# Altium PCB Arduino_Board.PcbDoc
Units mil, origin at the board's own origin, x right, y up, seen from the top; angles counter-clockwise.
Board outline 2677.17 x 1988.19 mil, 2 copper layers (Top Layer, Bottom Layer); 51 components, 49 nets, 203 pads, 74 vias.
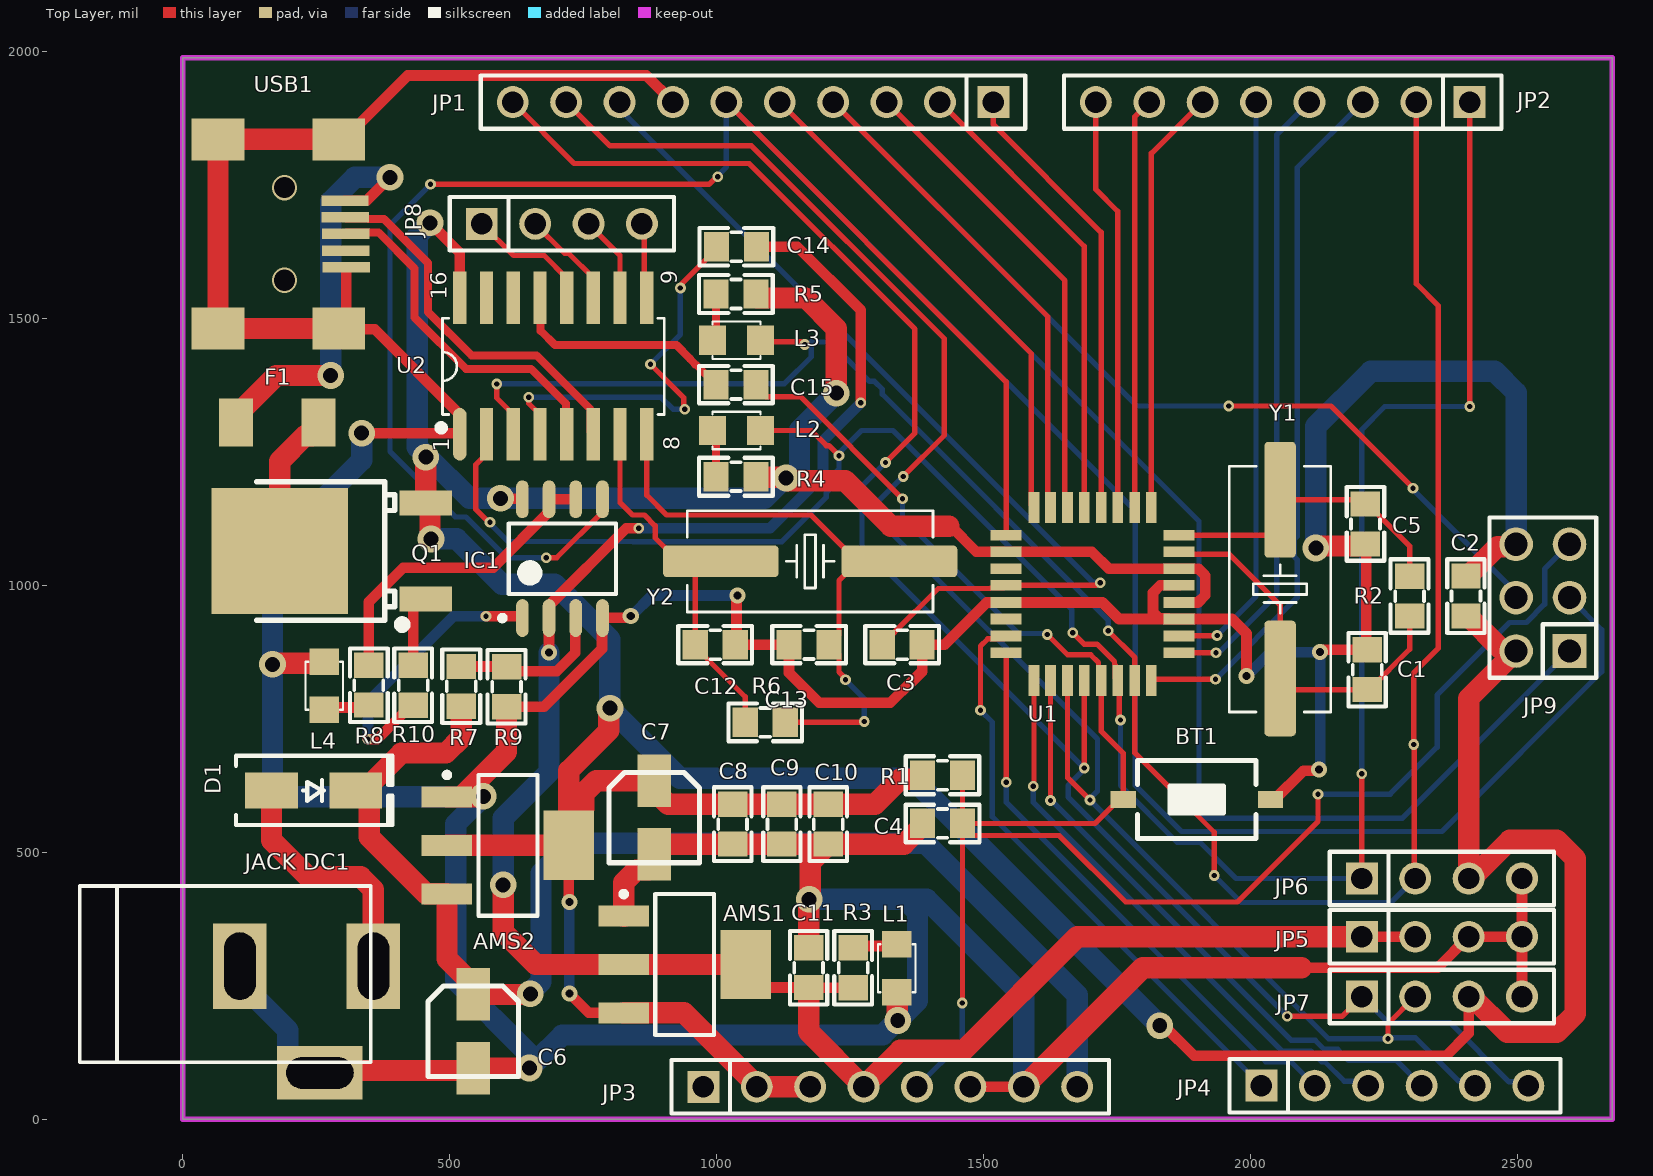
[diagram p0: Top Layer view]
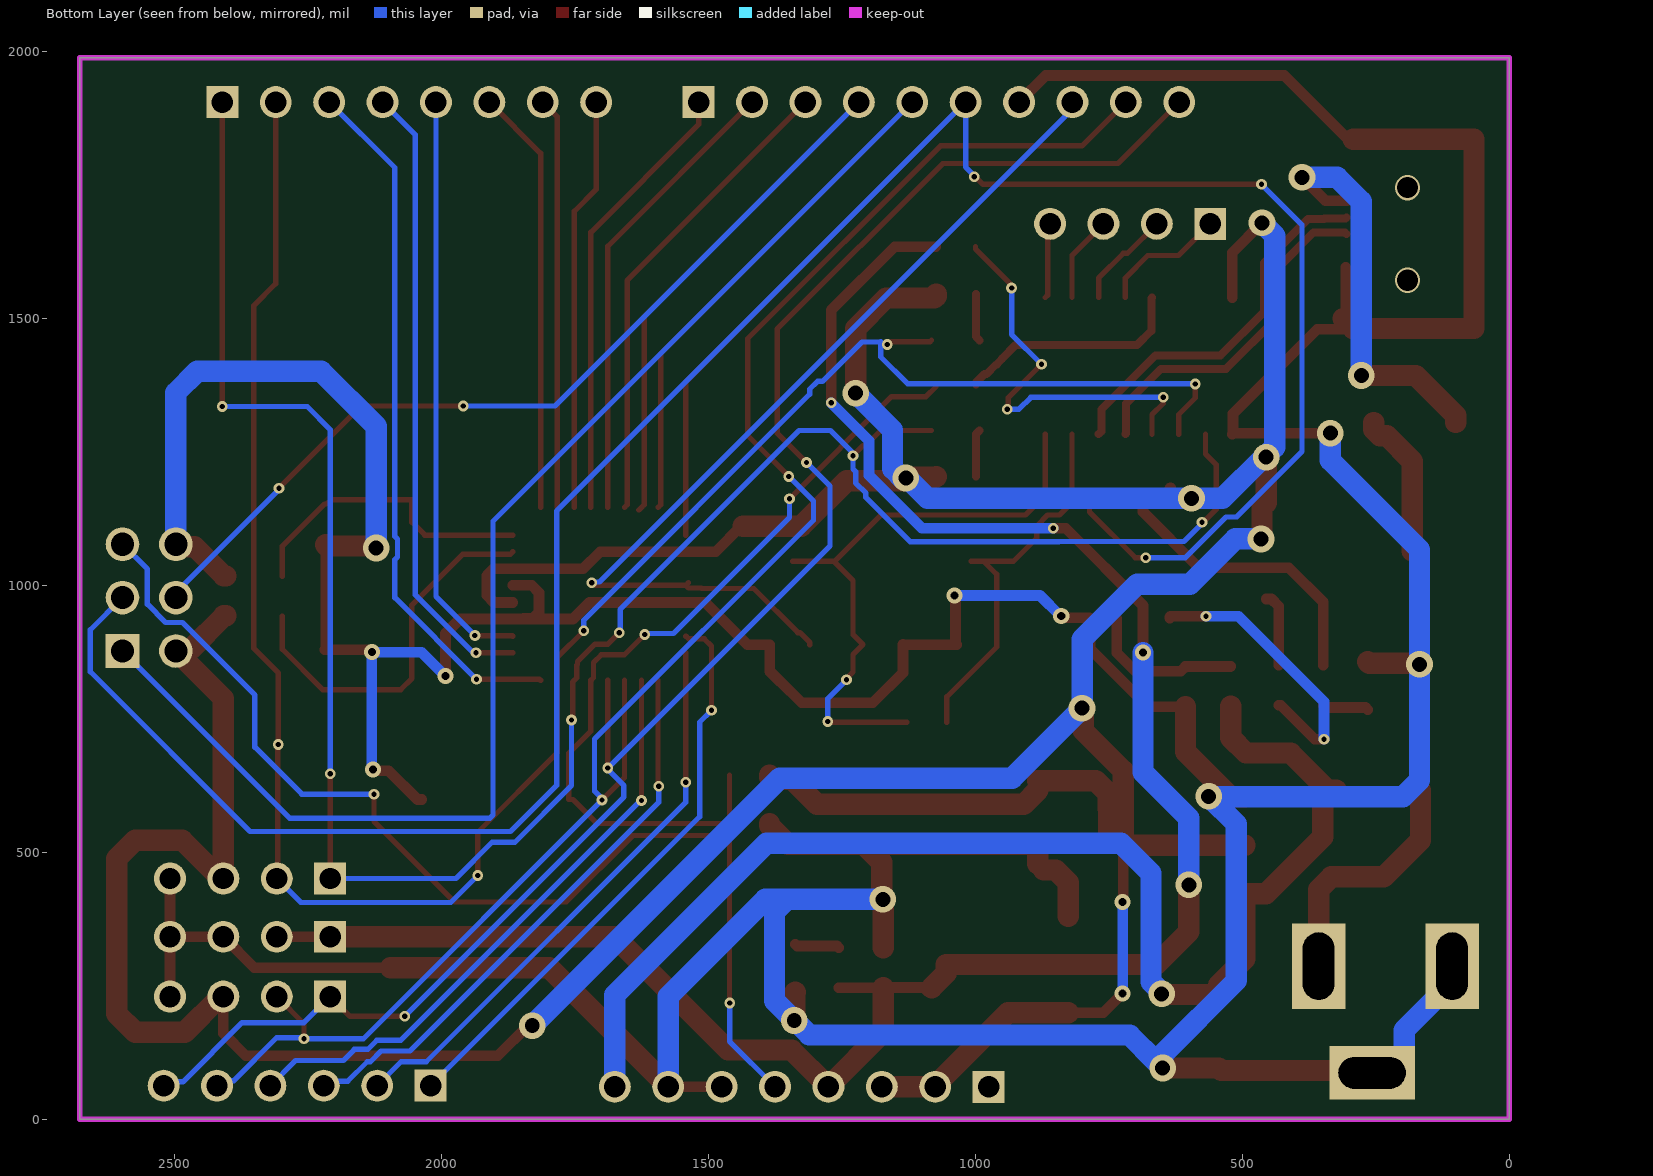
[diagram p1: Bottom Layer view, seen from below]
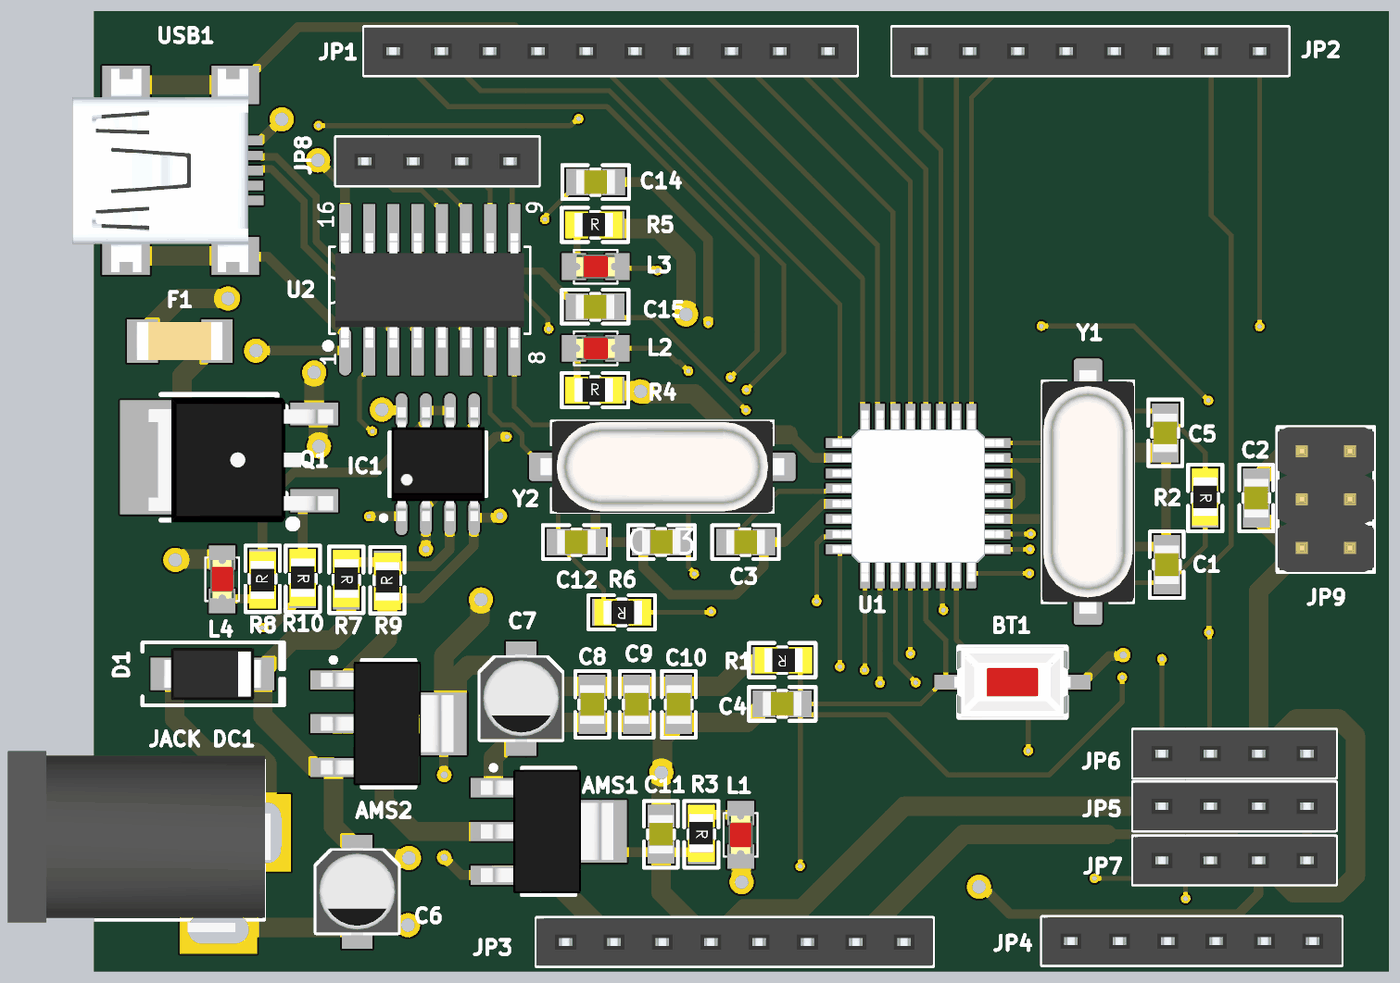
[diagram p2: 3D render of the assembled board from above, using the file's embedded part models]

## Layer stack, top to bottom
Top Solder: solder mask 0.4, Solder Resist, Dk 3.5
Top Layer: signal copper 1.4
Dielectric 1: dielectric 12.6, FR-4, Dk 4.8
Bottom Layer: signal copper 1.4
Bottom Solder: solder mask 0.4, Solder Resist, Dk 3.5

## Board outline
0,0 2677.17,0 2677.17,1988.19 0,1988.19

## Design rules (kind name [scope] priority, off if disabled: settings)
Clearance [All] p1: gap=10 ignorepadtopadclearanceinfootprint=FALSE except(0: Arc-Hole Track-Hole SMDPad-Hole THPad-Hole Via-Hole Fill-Hole Poly-Hole Region-Hole Text-Hole)
DiffPairsRouting [All] p1: maxlimit=10 minlimit=10 mostfreqgap=10 toplayer_minwidth=15 toplayer_maxwidth=15 toplayer_prefwidth=15 bottomlayer_minwidth=15 bottomlayer_maxwidth=15 bottomlayer_prefwidth=15 maxuncoupledlength=500
PolygonConnect [All] p1: connectstyle=Relief reliefconductorwidth=10 reliefentries=4 polygonreliefangle="90 Angle" airgapwidth=10
RoutingVias [All] p1: holewidth=15 width=30 viastyle="Through Hole" minholewidth=10 minwidth=20 maxholewidth=28 maxwidth=50
SolderMaskExpansion [All] p1: expansion=4 istentingtop=FALSE
Width [All] p1: maxlimit=40 minlimit=10 preferedwidth=20
29 further rules are at their usual default settings.

## Classes and differential pairs
differential pair USB: +USB_P -USB_N

## Components (designator, comment, footprint, x,y, rotation, side; value= is the part's Value field where it differs from the comment)
AMS1 "AMS1117-3.3V" SOT223 940,290 r270 top value="AMS1117-3.3V SOT223"
AMS2 "AMS1117-5V" SOT223 609,513 r270 top value="AMS1117-3.3V SOT223"
BT1 "Nut Nhan 2 Chan SMD 3x6x2.5" "Nut Nhan 2 Chan SMD 3x6x2.5" 1899,599 r180 top
C1 "22pF" "tu 0805" 2218,842 r90 top
C2 "104" "tu 0805" 2403,980 r90 top
C3 "104" "tu 0805" 1347,889 r0 top
C4 "104" "tu 0805" 1423,554 r180 top
C5 "22pF" "tu 0805" 2215,1115 r270 top
C6 "10uF" "tu nhom 4 (b)" 544,165 r270 top
C7 "10uF" "tu nhom 4 (b)" 883,565 r270 top
C8 "104" "tu 0805" 1030,553 r270 top
C9 "104" "tu 0805" 1122,553 r270 top
C10 "104" "tu 0805" 1209,553 r270 top
C11 "104" "tu 0805" 1172,284 r90 top
C12 "22pF" "tu 0805" 997,889 r0 top
C13 "22pF" "tu 0805" 1173,889 r180 top
C14 "104" "tu 0805" 1037,1634 r180 top
C15 "104" "tu 0805" 1035.94,1376 r0 top
D1 "M7" "DIODE SMA" 245,616 r0 top
F1 "0.5A 125V" "Cau Chi SMD1808" 177,1305 r0 top
IC1 "LM358 SOP8" "SOP 8" 711,1050 r90 top
"JACK DC1" "JACK DC 5.5" "JACK DC 5.5" 232,187 r0 top value="Jac DC"
JP1 "JP 1x10 2.54" "JP 1x10 CT" 1518,1905 r180 top
JP2 "JP 1x8 2.54" "JP 1x8 CT" 2410,1905 r180 top
JP3 "JP 1x8 2.54" "JP 1x8 CT" 975,61 r0 top
JP4 "JP 1x6 2.54" "JP 1x6 CT" 2020,63 r0 top
JP5 "JP 1x4 2.54" "JP 1x4 CT" 2208,342 r0 top
JP6 "JP 1x4 2.54" "JP 1x4 CT" 2208,451 r0 top
JP7 "JP 1x4 2.54" "JP 1x4 CT" 2208,230 r0 top
JP8 "JP 1x4 2.54" "JP 1x4 CT" 560,1677 r0 top
JP9 "JP 2x3 2.54" "JP 2x3 DT" 2547,977 r90 top
L1 "LED 0805" LED-0805-Red 1337,328 r270 top
L2 "LED 0805" LED-0805-Red 992,1290 r0 top
L3 "LED 0805" LED-0805-Red 992,1459 r0 top
L4 "LED 0805" LED-0805-Red 265,767 r90 top
Q1 "TO-252" TO-252-3_L6.6-W6.1-P4.57-LS9.9-BR-CW 279,1059 r0 top
R1 "10k" "tro smd 0805" 1422.9,642 r180 top
R2 "1M" "tro smd 0805" 2300,980 r270 top
R3 "220R" "tro smd 0805" 1258,284 r270 top
R4 "1k" "tro smd 0805" 1035.83,1206 r0 top
R5 "1k" "tro smd 0805" 1035.83,1548 r0 top
R6 "1M" "tro smd 0805" 1091,741 r180 top
R7 "10k" "tro smd 0805" 524,811 r270 top
R8 "1k" "tro smd 0805" 346,813 r90 top
R9 "10k" "tro smd 0805" 604,810 r90 top
R10 "10k" "tro smd 0805" 434,813 r270 top
U1 "ATMEGA168-20AU" ATMEGA168 1704,984 r180 top
U2 "CH340C" SOIC16_50_284_25X90_SMT 693,1411 r90 top
USB1 "USB Mini 5p SMD" "USB Mini 5p SMD" 169,1655 r90 top
Y1 "16Mhz" "Thach Anh 2 chan SMD" 2055,993 r270 top value=4Mhz
Y2 "12Mhz" "Thach Anh 2 chan SMD" 1175,1045 r180 top value=4Mhz

## Footprints (in the part's own frame and the unit in brackets; to place one, negate y for a bottom-side part, rotate by r counter-clockwise, add the part's x,y. Pads: shape width x height; smd on the part's side, far side on the other; paste and mask are expansions set on the pad)
ATMEGA168 [mil]
  rect 58x20 smd: 1(-162,110) 2(-162,79) 3(-162,47) 4(-162,16) 5(-162,-16) 6(-162,-47) 7(-162,-79) 8(-162,-110) 17(162,-110) 18(162,-79) 19(162,-47) 20(162,-16) 21(162,16) 22(162,47) 23(162,79) 24(162,110)
  rect 20x58 smd: 9(-110,-162) 10(-79,-162) 11(-47,-162) 12(-16,-162) 13(16,-162) 14(47,-162) 15(79,-162) 16(110,-162) 25(110,162) 26(79,162) 27(47,162) 28(16,162) 29(-16,162) 30(-47,162) 31(-79,162) 32(-110,162)
  body extent -177,-177 177,177, height 47
"Cau Chi SMD1808" [mil]
  rect 64x90 smd: 1(-77,0) 2(77,0)
  body extent -91,-39 91,39, height 39
"DIODE SMA" [mm] "SMA"
  rect 2.5x1.7 smd: 1(-2,0) 2(2,0)
  silkscreen extent -3.68,-1.65 3.75,1.65, body extent -2.6,-1.37 2.6,1.37, height 2.4
"JACK DC 5.5" [mil] "Jac DC input"
  rect 100x160 hole 59.06 slot 125.98 at 90 deg: 1(125,100) 2(-125,100)
  rect 160x100 hole 59.06 slot 125.98 at 0 deg: 3(25,-100)
  silkscreen extent -425,-80 120,250, body extent -410,-105 134,269, height 434
"JP 1x4 CT" [mm]
  rect 1.52x1.52 hole 1.02: 1(0,0)
  round 1.52 hole 1.02: 2(2.54,0) 3(5.08,0) 4(7.62,0)
  silkscreen extent -1.52,-1.27 9.14,1.27, body extent -1.52,-1.25 9.14,1.25, height 8.51
"JP 1x6 CT" [mm] "6 row, straight, gold plating"
  rect 1.52x1.52 hole 1.02: 1(0,0)
  round 1.52 hole 1.02: 2(2.54,0) 3(5.08,0) 4(7.62,0) 5(10.16,0) 6(12.7,0)
  silkscreen extent -1.52,-1.27 14.22,1.27, body extent -1.52,-1.25 14.22,1.25, height 8.51
"JP 1x8 CT" [mm] "8 row, straight, gold plating"
  rect 1.52x1.52 hole 1.02: 1(0,0)
  round 1.52 hole 1.02: 2(2.54,0) 3(5.08,0) 4(7.62,0) 5(10.16,0) 6(12.7,0) 7(15.24,0) 8(17.78,0)
  silkscreen extent -1.52,-1.27 19.3,1.27, body extent -1.52,-1.25 19.3,1.25, height 8.51
"JP 1x10 CT" [mm] "10 row, straight, gold plating"
  rect 1.52x1.52 hole 1.02: 1(0,0)
  round 1.52 hole 1.02: 2(2.54,0) 3(5.08,0) 4(7.62,0) 5(10.16,0) 6(12.7,0) 7(15.24,0) 8(17.78,0) 9(20.32,0) 10(22.86,0)
  silkscreen extent -1.52,-1.27 24.38,1.27, body extent -1.52,-1.25 24.38,1.25, height 8.51
"JP 2x3 DT" [mm]
  rect 1.6x1.6 hole 1.1: 1(-2.54,-1.27)
  round 1.6 hole 1.1: 2(0,-1.27) 3(2.54,-1.27) 4(2.54,1.27) 5(0,1.27) 6(-2.54,1.27)
  silkscreen extent -3.81,-2.54 3.81,2.54, body extent -3.81,-2.54 3.81,2.54, height 8.55
LED-0805-Red [mil]
  rect 50x55 smd: 1(0,0) 2(90,0)
  silkscreen extent 0,-35 90,35, body extent 5,-25 85,25, height 43
"Nut Nhan 2 Chan SMD 3x6x2.5" [mm] "Switch SMD type"
  rect 1.2x0.8 smd: 1(-3.5,0) 2(3.5,0)
  silkscreen extent -2.82,-1.85 2.82,1.85, body extent -3.05,-1.85 3.05,1.85, height 2.5
SOIC16_50_284_25X90_SMT [mm]
  oval 2.5x0.635 smd mask+0.076: 1(-3.25,4.42)
  rect 2.5x0.635 smd mask+0.076: 2(-3.25,3.15) 3(-3.25,1.88) 4(-3.25,0.61) 5(-3.25,-0.66) 6(-3.25,-1.93) 7(-3.25,-3.2) 8(-3.25,-4.47) 9(3.25,-4.47) 10(3.25,-3.2) 11(3.25,-1.93) 12(3.25,-0.66) 13(3.25,0.61) 14(3.25,1.88) 15(3.25,3.15) 16(3.25,4.42)
  silkscreen extent -3.07,-5.3 2.26,5.44, body extent -3.02,-4.97 2.98,4.93, height 1.4
"SOP 8" [mm] "SOIC, 8-Leads, Body 4.9x3.9mm, Pitch 1.27mm, IPC High Density"
  oval 1.8x0.6 smd: 1(-2.825,1.905) 2(-2.825,0.635) 3(-2.825,-0.635) 4(-2.825,-1.905) 5(2.825,-1.905) 6(2.825,-0.635) 7(2.825,0.635) 8(2.825,1.905)
  silkscreen extent -2.95,-2.55 1.68,2.98, body extent -2.99,-2.45 3,2.45, height 1.6
SOT223 [mm]
  rect 1x2.4 smd: 1(-2.3,-2.9) 2(0,-2.9) 3(2.3,-2.9)
  rect 3.3x2.4 smd: 4(0,2.9)
  silkscreen extent -3.47,-3.02 3.35,1.4, body extent -3.25,-3.56 3.25,3.4, height 1.68
"Thach Anh 2 chan SMD" [mm] "SMD Crystal HC49/US-SM package"
  round 0.508 on Mech15: 0(0,0)
  rrect25% 5.5x1.5 smd: 1(-4.25,0) 2(4.25,0)
  silkscreen extent -5.84,-2.41 5.84,2.41, body extent -6.4,-2.41 6.4,2.42, height 4.29
TO-252-3_L6.6-W6.1-P4.57-LS9.9-BR-CW [mm]
  rect 2.5x1.2 smd: 1(4.475,-2.149) 3(4.475,2.423)
  rect 6.5x6 smd: 2(-2.475,0.137)
  silkscreen extent -3.57,-3.56 3.55,3.44, body extent -4.23,-3.29 5.47,3.29, height 2.32
"tro smd 0805" [mm]
  rect 1.2x1.4 smd: 1(-0.946,-0.061) 2(0.954,-0.061)
  silkscreen extent -1.75,-0.97 1.75,0.84, body extent -1.56,-0.76 1.44,0.64, height 0.53
"tu 0805" [mm] "Compoment SMD 80x50mil"
  rect 1.2x1.4 smd: 1(-0.946,-0.003) 2(0.954,-0.003)
  silkscreen extent -1.75,-0.89 1.75,0.89, body extent -1.01,-0.64 1.01,0.63, height 0.61
"tu nhom 4 (b)" [mm]
  rect 2.5x1.6 smd: 1(-1.75,0) 2(1.75,0)
  silkscreen extent -2.15,-2.15 2.15,2.15, body extent -2.31,-2.15 2.29,2.15, height 3.91
"USB Mini 5p SMD" [mm]
  rect 0.5x2.25 smd: 1(1.651,-3.429) 2(0.864,-3.442) 3(0.076,-3.454) 4(-0.711,-3.467) 5(-1.499,-3.48)
  rect 2x2.5 smd: 5(-4.424,-3.124) 5(-4.42,2.616) 5(4.576,-3.124) 5(4.58,2.616)
  body extent -5.27,-3.8 5.43,5.4, height 3.95

## Part data
AMS1 AMS2: library part "AMS1117 SMD", "Dán", Chung_Loai=Dán, Don_Vi=Con, Ma_Hang=MH000596
C1 C5 C12 C13: library part "Tu 0805 22pF 50V 10%", "Dán", Chung_Loai=Dán, Don_Vi=Con, Ma_Hang=MH004560, So_Chan=2, Ten_Linh_Kien="Tụ 0805 22P 10% 50V"
C2 C3 C4 C8 C9 C10 C11 C14 C15: library part "Tu 0805 104 50V 10%", "Dán", Chung_Loai=Dán, Don_Vi=Con, Ma_Hang=MH004551, So_Chan=2, Ten_Linh_Kien="Tụ 0805 104-100nF 10% 50V"
C6 C7: library part "Tu Nhom 10uF 25V", "Dán", Chung_Loai=Dán, Don_Vi=Con, Ma_Hang=MH002230, So_Chan=2, Ten_Linh_Kien="Tụ Nhôm 10uF 25V 4x5MM"
D1: library part "Diode M7 ( 4007 )", "Dán", Chung_Loai=Dán, Don_Vi=Con, Ma_Hang=MH000944, Ten_Linh_Kien="Diode M7 1N4007 SMD 1A 1000V"
F1: library part "Cau chi 0.5A 125V SMD1808", "Cau chi 0.5A 125V SMD1808", Ma_Hang=MH009241, Ten="Cầu Chì 0.5A 125V SMD1808 0451.500MRL"
IC1: "Dán", Chung_Loai=Dán, Don_Vi=Con, Ma_Hang=MH000609, Ten_Linh_Kien="LM358 SOP8"
JP1: library part "JP 1x10 2.54 Cai Thang", "Cắm", Chung_Loai=Cắm, Don_Vi=Con, Ma_Hang=MH004006, Ten_Linh_Kien="Jump Đơn Cái 2.54MM 1x20P Thẳng"
JP2 JP3: library part "JP 1x8 2.54 Cai Thang", "Cắm", Chung_Loai=Cắm, Don_Vi=Con, Ma_Hang=MH004006, Ten_Linh_Kien="Jump Đơn Cái 2.54MM 1x20P Thẳng"
JP4: library part "JP 1x6 2.54 Cai Thang", "Cắm", Chung_Loai=Cắm, Don_Vi=Con, Ma_Hang=MH004006, Ten_Linh_Kien="Jump Đơn Cái 2.54MM 1x20P Thẳng"
JP5 JP6 JP7 JP8: library part "JP 1x4 2.54 Cai Thang", "Cắm", Chung_Loai=Cắm, Don_Vi=Con, Ma_Hang=MH004006, Ten_Linh_Kien="Jump Đơn Cái 2.54MM 1x20P Thẳng"
JP9: library part "JP 2x3 2.54 Duc Thang", "Cắm", Chung_Loai=Cắm, Don_Vi=Con, Ma_Hang=MH002686, Ten_Linh_Kien="Jump Đôi Đực 2.54MM 2x40P Thẳng 11MM"
L1 L2 L3 L4: library part "LED 0805 Do", "Dán", Chung_Loai=Dán, Don_Vi=Con, Ma_Hang=MH000897, Ten_Linh_Kien="LED 0805 Màu Đỏ (Red)"
Q1: library part "FET AO D409", "P-Channel Power MOSFET", ComponentLink1Description="Manufacturer Link", ComponentLink1URL=http://www.irf.com/, ComponentLink2Description=Datasheet, ComponentLink2URL=http://www.irf.com/product-info/datasheets/data/irf9540.pdf, DatasheetVersion=PD-9.421C, LatestRevisionDate=17-Jul-2002, LatestRevisionNote="Re-released for DXP Platform.", Note="Pin 2 is electrically connected to pin 4.", PackageDescription="TO, Thru-Hole, Vertical, Heatsink Mounted; 3 In-Line Leads; Pitch 2.54 mm", PackageReference=TO-220AB, PackageVersion=Feb-1997, Published=8-Jun-2000, Publisher="Altium Limited"
R1 R7 R9: library part "Tro 0805 1% 10k", "Dán", Chung_Loai=Dán, Don_Vi=Con, Ma_Hang=MH005473, So_Chan=2, Ten_Linh_Kien="Trở 0805 1% 10k"
R2 R6: library part "Tro 0805 1% 1M", "Dán", Chung_Loai=Dán, Don_Vi=Con, Ma_Hang=MH005469, So_Chan=2, Ten_Linh_Kien="Trở 0805 1% 1M"
R3 R4 R5 R8 R10: library part "Tro 0805 1% 200k", "Dán", Chung_Loai=Dán, Don_Vi=Con, Ma_Hang=MH005483, So_Chan=2, Ten_Linh_Kien="Trở 0805 1% 200k"
U1: "AVR AVRÂ® ATmega Microcontroller IC 8-Bit 20MHz 16KB _8K x 16_ FLASH 32-TQFP _7x7_", Package="TQFP-32 Microchip", Availability=Unavailable, MF=Microchip, MP=ATMEGA168-20AU, Price=None, SnapEDA_Link=https://www.snapeda.com/parts/ATMEGA168-20AU/Microchip/view-part/776709/?ref=snap
U2: "USB Bridge, USB to UART USB 2.0 UART Interface", Alternate Part Number-1=NA, Case/Package=SOIC16, Manufacturer=Olimex, Supplier Part Number-1=C84681, Manufacturer Part Number=CH340C, Supplier-1=LCSC
USB1: "USB Type B", Ma_Hang=MH001022, Ten="MiniUSB 5P SMD"
Y1 Y2: library part "Thach Anh 2 chan SMD", "Crystal For all Crystal 2pin."
BT1: Ma_Hang=MH001036, Ten="Nút Nhấn 2 Chân 3x6x2.5MM SMD"

## Via types
v1: diameter 20, hole 10, Top Layer to Bottom Layer, 45 vias
v2: diameter 50, hole 28, Top Layer to Bottom Layer, 19 vias
v3: diameter 30, hole 15, Top Layer to Bottom Layer, 8 vias
v4: diameter 47.24, hole 39.37, Top Layer to Bottom Layer, 2 vias

## Nets (pads, with @x,y where several pads share a name; then routed paths per layer and width w, separated by ;. In a path a pad name is that pad's centre, name@x,y a point inside that pad or via, vN(x,y) a via of type N, cw(c..) or ccw(c..) an arc to the next point about the centre after c; other vN are vias at no path point)
+3.3: AMS1.2 AMS1.4 C11.1 C14.1 IC1.2 JP3.4 JP5.1 JP5.2 R3.2 | length 3977.9
  Top Layer w20: v3(686,874) IC1.2 686,962.4 830.38,1106.78 v1(854,1106.78) ; AMS1.4@1054.17,279.24 1091.42,242 1091.42,246.77 C11.1 1172.31,246.6 1255.43,246.6 R3.2 ; C14.1 1150.87,1634.13 1270,1515 v1(1270,1342) ; JP5.1 JP5.2
  Top Layer w40: v2(600,439.2) 600,351 661,290 AMS1.2 AMS1.4 1054.17,279.24 1054.17,274.02 AMS1.4@1081.42,246.77 ; C11.1 1172.13,163.87 JP3.4 1344,130 1463,130 1675,342 JP5.1
  Bottom Layer w20: v1(854,1106.78) 1099.64,1106.78 1198.93,1206.07 1198.93,1270.93 v1(1270,1342)
  Bottom Layer w40: v2(600,439.2) 600,564.22 686,650.22 v3(686,874)
+5: AMS1.3 AMS2.2 AMS2.4 C2.1 C7.1 C8.1 C9.1 C10.1 IC1.8 JP3.2 JP3.3 JP6.3 JP7.3 JP9.6 Q1.3 R1.2 R4.2 R5.2 U1.4 U1.6 U1.18 U2.16 | length 9022.2
  Top Layer w20: Q1.3 Q1.3@459.46,1154.37 ; v2(463,1679) 518.98,1623.02 U2.16 ; v2(595,1163) 595.89,1162.11 635.11,1162.11 IC1.8 ; IC1.8@634.33,1183.09 IC1.8@636,1181.41 ; AMS2.4 723.17,407.83 v3(724,407) ; v3(724,236) 760.3,199.7 825.57,199.7 AMS1.3 ; 1435,1111 1438.08,1111 1486.08,1063 U1.18 1702.43,1063 1734.43,1031 U1.6 1902.28,1031 1915,1018.28 1915,981.72 1901.28,968 U1.4 ; v2(1829.61,175.39) 1837.72,175.39 1894.12,119 2366,119 2408,161 JP7.3
  Top Layer w40: Q1.3 v2(455.18,1240) ; Q1.3@459.46,1154.37 463.09,1150.75 463.09,1088.91 v2(465,1087) ; AMS2.2 AMS2.4 ; v2(800,770) 798.09,768.09 798.09,728.26 723.17,653.35 AMS2.4 ; AMS1.3 938.82,199.45 1075,63.27 JP3.2 JP3.3 ; C7.1@883,616.18 908.95,590.23 C8.1 C9.1 C10.1 1296.43,590.23 1343.03,636.83 1381.7,636.83 1385.32,640.46 R1.2 ; C7.1 774.43,633.9 751,610.47 751,581.39 750.42,580.81 750.42,540.24 AMS2.4 ; R4.2 1074.77,1202.25 1128.75,1202.25 v2(1130.11,1200.89) ; R5.2 1073.41,1541.67 1077.03,1538.05 1166.95,1538.05 1224,1481 v2(1224,1360) ; v2@1133.09,1197.91 1135,1196 1240.85,1196 1325.85,1111 1435,1111 ; C2.1 2407.07,942.77 2468.44,881.4 2492.6,881.4 JP9.6 2408,788 JP6.3 2413.37,451 2485.37,523 2573,523 2608,488 2608,198 2573,163 2480.37,163 2413.37,230 JP7.3
  Bottom Layer w20: v3(724,236) v3(724,407)
  Bottom Layer w40: v2(455.18,1240) 455.18,1242.71 439,1258.89 439,1655 v2(463,1679) ; v2@457.59,1242.41 537,1163 1089.52,1163 1127.41,1200.89 v2(1130.11,1200.89) ; v2(465,1087) 513,1087 598,1002 697,1002 800,899 800,801.91 v2(800,770) 931,639 1366,639 v2(1829.61,175.39) ; v2@1135,1198.71 1155,1218.71 1155,1291 v2(1224,1360)
AD0: JP4.1 U1.23 | length 1096.9
  Top Layer w10: v1(1494,766) 1494,886.21 1507.79,900 1537,900 U1.23
  Bottom Layer w10: v1(1494,766) 1516,744 1516,567 JP4.1
AD1: JP4.2 U1.24 | length 1077.9
  Top Layer w10: v1(1542,631) U1.24
  Bottom Layer w10: v1(1542,631) 1542,594 2028.08,107.92 2075.08,107.92 JP4.2
AD2: JP4.3 U1.25 | length 1075.6
  Top Layer w10: v1(1593,624) 1594,625 U1.25
  Bottom Layer w10: v1(1593,624) 1593,593.64 2058.72,127.92 2112.51,127.92 2132.51,107.92 2138.61,107.92 2175.08,71.45 2211.55,71.45 JP4.3
AD3: JP4.4 U1.26 | length 1141.2
  Top Layer w10: v1(1625,597) U1.26
  Bottom Layer w10: v1(1625,597) 1627,597 2076.08,147.92 2120.79,147.92 2137.72,131 2162.72,131 2183.49,110.23 2272.77,110.23 JP4.4
AD4/SDA: JP1.9 JP4.5 JP7.2 U1.27 | length 3281.3
  Top Layer w10: JP1.9 800,1823 1065,1823 1426,1462 1426,1281 v1(1349,1204) ; U1.27 1657,640 v1(1699,598) ; v1(2257,151) 2257,179 JP7.2
  Bottom Layer w10: v1(1349,1204) 1303,1158 1303,1122 1713,712 1713,614.71 1699,600.71 v1(1699,598) 2146,151 v1(2257,151) 2258.91,152.91 2308.09,152.91 2388.46,72.54 2410.46,72.54 JP4.5 ; JP7.2@2308,216.51 JP7.2
AD5/SCL: JP1.10 JP4.6 JP7.1 U1.28 | length 3311.6
  Top Layer w10: JP1.10 733,1790 1060.71,1790 1371,1479.71 1371,1285 v1(1316,1230) ; v1(1688,658) U1.28 ; v1(2068.64,193) 2171,193 JP7.1
  Bottom Layer w10: v1(1316,1230) 1272,1186 1272,1074 v1(1688,658) 1688,655.29 1658,625.29 1658,603.64 v1(2068.64,193) ; JP7.1 2257,181 2373,181 2483.74,70.26 2512.74,70.26 JP4.6
AREF: C3.1 JP1.8 U1.20 | length 1746.1
  Top Layer w10: C3.1 1309.77,892.8 1328.39,911.43 1332.33,911.43 1414.91,994 1512.14,994 1513.14,995 1537,995 U1.20 ; U1.20@1537,1005 U1.20 ; v1(1718,1005) 1715.29,1005 1710.29,1000 U1.20
  Bottom Layer w10: JP1.8 818,1892 1703.82,1006.18 1716.82,1006.18 v1(1718,1005)
CH340_XT1: C12.1 R6.2 U2.7 Y2.2 | length 725.8
  Top Layer w10: U2.7 818.98,1154.96 842.16,1131.78 864.36,1131.78 884.8,1111.34 884.8,1089.14 928.94,1045 Y2.2@984.12,1045 ; Y2.2 Y2.2@984.12,1045 ; R6.2 1053.43,791.28 959.77,884.93 C12.1 959.77,1020.65 Y2.2@984.12,1045
CH340_XT2: C13.1 R6.1 U2.8 Y2.1 | length 1137.1
  Top Layer w10: U2.8 868.98,1169.02 906.22,1131.78 1176.8,1131.78 1263.58,1045 Y2.1@1264.87,1045 ; R6.1 1274.39,743.39 v1(1276,745) ; v1(1241,823) 1241,825.71 1228.85,837.86 1228.85,870.51 C13.1 1228.85,907.76 1228.85,1008.98 Y2.1@1264.87,1045 ; Y2.1 Y2.1@1264.87,1045
  Bottom Layer w10: v1(1241,823) 1276,788 v1(1276,745)
CTS: JP8.4 U2.9 | length 141.8
  Top Layer w10: JP8.4 864.49,1672.51 864.49,1543.44 U2.9
DCD: JP8.1 U2.12 | length 237.7
  Top Layer w10: JP8.1 619.38,1617.62 677.02,1617.62 718.98,1575.67 U2.12
DSR: JP8.3 U2.10 | length 162.5
  Top Layer w10: JP8.3 818.98,1618.02 U2.10
DTR: C15.1 U2.13 | length 435.8
  Top Layer w15: U2.13 670.28,1537.65 670.28,1476.72 697,1450 924.57,1450 949.5,1425.07 949.5,1424.25 959.75,1414 960.57,1414 978.65,1395.93 982.59,1395.93 998.71,1379.8 C15.1
GND: "JACK DC1.2" "JACK DC1.3" AMS1.1 AMS2.1 BT1.1 C1.2 C2.2 C3.2 C4.2 C5.2 C6.2 C7.2 C8.2 C9.2 C10.2 C11.2 C12.2 C13.2 IC1.4 JP1.7 JP3.6 JP3.7 JP5.3 JP5.4 JP6.4 JP7.4 JP9.4 L1.2 L4.2 R9.1 U1.3 U1.5 U1.21 U2.1 USB1.5 | length 12798
  Top Layer w20: USB1.5@292,1480.83 311,1480.83 312.33,1479.5 359.5,1479.5 517.48,1321.52 517.48,1284.55 U2.1 517.03,1285 v2(335,1285) ; USB1.5@292,1835.17 301.84,1835.17 421.6,1954.92 868.08,1954.92 JP1.7 ; USB1.5@306,1494.83 USB1.5@306,1596 ; R9.1 676.7,772.77 785.31,881.38 785.31,938.09 IC1.4 786.9,938.78 787.67,939.55 832.84,939.55 836.29,943 v3(839,943) ; C7.2@861.5,456.89 871.5,466.89 C7.2@883,478.39 ; C12.2 C12.2@1034.71,889 ; v3(1039,981) 1037.09,979.09 1037.09,891.38 C12.2@1034.71,889 ; JP3.6@1467.38,68.62 JP3.6 JP3.7 ; U1.5 1830.72,1000 1817,986.28 1817,949.72 1828.72,938 1846,938 U1.3@1847,937 ; v3(1992,830) 1992,910 1965,937 U1.3 U1.3@1847,937 ; BT1.1 2044.67,599 2098.76,653.09 2126.09,653.09 v3(2128,655) ; 2095,284 2350,284 JP5.3 JP5.4 ; v3(2130,875) 2134.57,879.57 C1.2 2216.5,881.21 2216.5,1075.79 C5.2 ; JP7.4 JP5.4 ; JP6.4 JP5.4 ; C12.2@1034.71,889 1135.29,889 C13.2 1135.43,836.57 1192,780 1325,780 1365,820 1365.73,820 1384.57,838.85 C3.2 1426.58,888.87 1505.72,968 1722.43,968 1753.43,937 U1.3@1847,937
  Top Layer w40: v2(168,852) 169.91,853.91 261.91,853.91 L4.2 ; 257,87 261.55,91.55 539.45,91.55 C6.2@543.95,96.05 ; USB1.5@292,1480.83 291.92,1480.92 66.08,1480.92 66,1481 66,1835.33 66.08,1835.25 291.92,1835.25 USB1.5@292,1835.17 ; USB1.5@306,1494.83 USB1.5@311,1499.83 ; AMS2.1 AMS2.1@521.76,603.55 ; C6.2 C6.2@543.95,96.05 ; v2(563,605) 561.87,603.87 522.07,603.87 AMS2.1@521.76,603.55 ; R9.1 606.39,688.19 AMS2.1@521.76,603.55 ; v2(649,96) 648.95,96.05 C6.2@543.95,96.05 ; AMS1.1 825.83,443.46 849.26,466.89 C7.2@871.5,466.89 ; C7.2@883,478.39 C7.2 883,503.93 894.5,515.43 C8.2 C9.2 C10.2@1204.93,515.43 ; C11.2 1172.13,411.13 v2(1173,412) 1174.91,413.91 1174.91,481.47 1201.31,507.87 1201.31,511.8 C10.2@1204.93,515.43 ; L1.2 1338,237 1338,186 v2(1339,185) ; C4.2 1385.43,550.2 1350.65,515.43 C10.2 C10.2@1204.93,515.43 ; JP3.7 1798,284 2095,284 ; v2(2122,1070) 2124.71,1070 2128.51,1073.8 2214.51,1073.8 C5.2@2216.5,1075.79 ; C2.2 2407.07,1017.57 2462.1,1072.6 2492.6,1072.6 JP9.4
  Bottom Layer w20: v3(839,943) 840.78,943 878.78,981 v3(1039,981) ; v3(1992,830) 2037,875 v3(2130,875) 2130,657 v3(2128,655)
  Bottom Layer w40: 107,287 107,257 197,167 197,117 227,87 257,87 ; v2(335,1285) 335,1234 168,1067 v2(168,852) 168,635 199,604 562,604 v2(563,605) 511,553 511,260 649,122 v2(649,96) ; v2@662,109 711,158 1310.57,158 1337.57,185 v2(1339,185) 1376,222 1376,388.57 1352.57,412 ; v2(1173,412) 1352.57,412 ; JP3.7 1575,230 1393,412 1352.57,412 ; v2(2122,1070) 2122,1298 2225,1401 2457,1401 2497,1361 JP9.4
IO0/RXD: JP2.1 JP6.1 L2.2 U1.30 U2.2 | length 4264.9
  Top Layer w10: U2.2 568.98,1246.33 548.98,1226.34 548.98,1142.16 572.72,1118.43 v1(575.43,1118.43) ; L2.2 1177,1290 1205.25,1261.75 1210.18,1261.75 v1(1228.93,1243) ; v1(1667,911) 1688,890 1712.21,890 1745,857.21 1745,851.86 1746,850.86 1746,827 U1.30 1754.09,818.91 1754.09,749.91 v1(1756,748) ; JP6.1 v1(2208,647) ; v1(2410,1335) JP2.1
  Bottom Layer w10: v1(575.43,1118.43) 575.43,1115.72 609.15,1082 843.42,1082 843.64,1081.78 864.36,1081.78 1101.42,1081.78 1122.13,1081.78 1205,1164.64 1205,1173 1224,1192 1224,1213 1228.93,1217.93 v1(1228.93,1243) ; v1@1224,1243 1271,1290 1329.72,1290 1665.09,954.63 1665.09,912.91 v1(1667,911) ; v1(1756,748) 1756,625.28 1862.28,519 1904.71,519 1972.71,451 JP6.1 ; v1(2208,647) 2208,1292 2251,1335 v1(2410,1335) ; JP2.1 JP2.1@2416,1899
IO1/TXD: JP2.2 JP6.2 L3.2 U1.31 U2.3 | length 4095.4
  Top Layer w10: v1(588,1377) 588,1350.74 618.98,1319.76 U2.3 ; L3.2 1085,1456 1157.3,1456 1162.3,1451 v1(1165.01,1451) ; v1(1733,915) 1783,865 U1.31 1783,686.35 1931.68,537.68 v1(1931.68,456.68) ; JP6.2 2306.5,452.5 2306.5,700.5 v1(2305,702) 2305,836 2351,882 2351,1524 2310,1565 JP2.2
  Bottom Layer w10: v1(588,1377) 588.75,1377.75 1126.75,1377.75 1177,1428 1177,1456 1177.18,1455.82 1212.18,1455.82 1286,1382 1295.36,1382 1310,1367.36 1310,1358 1733,935 v1(1733,915) ; v1(1165.01,1451) 1177,1451 ; v1(1931.68,456.68) 1982.28,406.08 2263.08,406.08 JP6.2 ; JP2.2@2305,1900 JP2.2
IO2: JP2.3 U1.32 | length 1320.3
  Top Layer w10: U1.32 1816,824 v1(1934,824)
  Bottom Layer w10: v1(1934,824) 2087,977 2087,1048.43 2082,1053.43 2082,1086.57 2087,1091.57 2087,1782 JP2.3
IO3: JP2.4 U1.1 | length 1175.6
  Top Layer w10: U1.1 v1(1935,874)
  Bottom Layer w10: v1(1935,874) 1936.91,875.91 1942.27,875.91 2049,982.64 2049,1844 JP2.4
IO4: JP2.5 U1.2 | length 1100.7
  Top Layer w10: U1.2 1866.5,905.5 1936.5,905.5 v1(1937,906)
  Bottom Layer w10: v1(1937,906) 2010,979 JP2.5
IO5: JP2.6 U1.9 | length 798.8
  Top Layer w10: U1.9 1814,1809 JP2.6
IO6: JP2.7 U1.10 | length 770.2
  Top Layer w10: U1.10 1783,1878 JP2.7
IO7: JP2.8 U1.11 | length 776
  Top Layer w10: JP2.8 1710,1741.28 1751,1700.28 U1.11
IO8: JP1.1 U1.12 | length 842.7
  Top Layer w10: JP1.1 1518,1863 1720,1661 U1.12
IO9: JP1.2 U1.13 | length 870.8
  Top Layer w10: JP1.2 1688,1635 U1.13
MISO: JP1.5 JP9.1 U1.16 | length 3442.5
  Top Layer w10: JP1.5 1589,1434 1589,1151 U1.16
  Bottom Layer w10: JP1.5 1903,1120 1903,569.86 1908.86,564 2284,564 JP9.1
MOSI: JP1.4 JP9.5 U1.15 | length 2606.5
  Top Layer w10: JP1.4 1620,1503 1620,1151 U1.15 U1.15@1630,1141 ; v1@1960,1337 v1(1959,1336) 2150,1336 v1(2304,1182)
  Bottom Layer w10: JP1.4 1787,1336 v1(1959,1336) ; v1(2304,1182) 2304,1179.29 2497,986.29 JP9.5
NetD1_1: "JACK DC1.1" D1.1 | length 465.7
  Top Layer w40: D1.1 166.26,522.74 235,454 333.57,454 357,430.57 357,287
NetF1_1: F1.1 USB1.1 | length 778.9
  Top Layer w20: USB1.1 344,1720 v2(388,1764)
  Top Layer w40: F1.1 100,1318 175,1393 v2(277,1393)
  Bottom Layer w40: v2(277,1393) 277,1719 322,1764 v2(388,1764)
NetIC1_3: IC1.3 R7.1 R9.2 | length 297.6
  Top Layer w20: R7.1 521.93,847.9 R9.2@606.07,847.9 ; R9.2@607,848.18 R9.2 614.97,839 700.5,839 735.31,873.81 735.31,938.09 IC1.3
NetIC1_6: IC1.6 IC1.7 R8.2 | length 599.3
  Top Layer w20: R8.2 348.39,968.71 412.69,1033 581.4,1033 686,1137.6 IC1.7 IC1.6
NetL1_1: L1.1 R3.1 | length 84.2
  Top Layer w20: R3.1 1258.99,324.61 1333.61,324.61 L1.1
NetL2_1: L2.1 R4.1 | length 89.1
  Top Layer w15: L2.1 998.61,1283.39 R4.1
NetL3_1: L3.1 R5.1 | length 89.3
  Top Layer w15: L3.1 998.61,1465.61 R5.1
NetL4_1: L4.1 R8.1 | length 87
  Top Layer w20: L4.1 269.39,771.39 344.01,771.39 R8.1
NetQ1_1: Q1.1 R10.1 | length 139.7
  Top Layer w20: R10.1 431.61,960.75 445.23,974.37 Q1.1
OUTPUT_A: IC1.1 R10.2 | length 538.4
  Top Layer w20: v1(347,712) 364.24,712 427.67,775.43 R10.2 ; v1(568,942) 634.33,942 636,940.33 IC1.1
  Bottom Layer w20: v1(347,712) 347,782 507,942 v1(568,942)
RESET: BT1.2 C4.1 C15.2 JP3.5 JP9.3 R1.1 U1.29 | length 3666.5
  Top Layer w10: C15.2 1073.51,1371.93 1092.13,1353.31 1156.69,1353.31 v1(1348,1162) ; v1(1460,218) 1460.23,218.23 C4.1 1708.46,554.13 1753.33,599 BT1.2 1761.2,685.77 1720,726.98 U1.29 1715,827 1715,855.21 1700.21,870 1657,870 v1(1619,908) ; C4.1@1460.13,554.24 R1.1 ; C4.1@1478.85,531.57 1641.32,531.57 1765.89,407 1975,407 2126,558 v1(2126,609)
  Top Layer w20: C4.1@1460.13,554.24 C4.1
  Bottom Layer w10: v1(1348,1162) 1348,1127 1565.09,909.91 1617.09,909.91 v1(1619,908) ; JP3.5 1460,146 v1(1460,218) ; v1(2126,609) 2261,609 2349,697 2349,794.76 2484.75,930.5 2516.26,930.5 2550.5,964.75 2550.5,1030.5 JP9.3
RI: JP8.2 U2.11 | length 187.7
  Top Layer w10: JP8.2 715.06,1621.94 722.7,1621.94 768.98,1575.67 U2.11
SCK: IC1.5 JP1.6 JP9.2 U1.17 | length 5583.1
  Top Layer w10: v1(464,1751) 985.29,1751 999.29,1765 v1(1002,1765) ; v1(681,1052) 700.4,1052 786,1137.6 IC1.5 ; JP1.6 1542,1381 U1.17
  Bottom Layer w10: v1(464,1751) 388,1675 388,1250.61 510.61,1128 530.5,1128 606.5,1052 v1(681,1052) ; v1(1002,1765) 1002,1767.71 1018,1783.71 JP1.6 1784,1139 1784,625.57 1870.57,539 2358,539 2657.17,838.17 2657.17,916.83 v1(2597,977)
SS: JP1.3 U1.14 | length 899.4
  Top Layer w10: JP1.3 1652,1571 1652,1151 U1.14
USB_N: U2.5 USB1.3 | length 658.3
  Top Layer w15: USB1.3 307.34,1660.34 346.48,1660.34 347.24,1661.1 366.79,1661.1 434.29,1593.6 434.29,1501.82 530.87,1405.25 652.58,1405.25 717.31,1340.52 717.31,1284.72 U2.5
USB_P: U2.6 USB1.2 | length 710.5
  Top Layer w15: USB1.2 306.84,1686.66 345.98,1686.66 346.53,1686.1 377.15,1686.1 459.29,1603.96 459.29,1512.18 541.23,1430.25 662.93,1430.25 763.98,1329.2 763.98,1288.05 U2.6
V3: C14.2 U2.4 | length 760.5
  Top Layer w10: v1(648,1352) 648,1340.74 668.98,1319.76 U2.4 ; v1(876,1414) 938.09,1351.91 938.09,1331.91 v1(940,1330) ; v1(932,1557) 933.91,1558.91 933.91,1564.68 999.43,1630.2 C14.2
  Bottom Layer w10: v1(648,1352) 896,1352 918,1330 v1(940,1330) ; v1(876,1414) 932,1470 v1(932,1557)
V_USB: F1.2 Q1.2 | length 278.2
  Top Layer w40: Q1.2 181.56,1232.56 229,1280 242,1280 254,1292 F1.2
VIN: AMS2.3 C6.1 D1.2 JP3.8 R7.2 | length 2447.5
  Top Layer w40: D1.2 339.49,616 409.52,686.03 493.03,686.03 521.61,714.61 R7.2 ; D1.2@335.67,616 349.14,602.54 349.14,528.86 455.55,422.45 AMS2.3 494.83,300.79 544,251.61 C6.1 649.9,233.9 v2(651,235)
  Bottom Layer w40: v2(651,235) 651,237.71 671,257.71 671,461 727,517 1391,517 1675,233 JP3.8
XTAL1: C1.1 R2.2 U1.7 Y1.2 | length 712.4
  Top Layer w10: U1.7 1871,1058 1960,1058 2055,963 Y1.2 2075.91,804.77 C1.1 2222.07,804.77 2297.61,880.31 R2.2
XTAL2: C5.1 R2.1 U1.8 Y1.1 | length 575.9
  Top Layer w10: U1.8 2030.65,1094 2055,1118.35 Y1.1 2206.77,1160.32 C5.1 2218.8,1152.23 2297.61,1073.43 R2.1
pads on no net: JP3.1 U1.19 U1.22 U2.14 U2.15 USB1.4 Y1.0 Y2.0
copper on no net:
  other v4: 190.43,1571.39 190.43,1744.61

## Keep-outs
Keep-Out Layer:
  the board outline again, w10

## Text inside footprints (layer, text, board x,y; h text height)
U2: Top Overlay "16" at 493.98,1535.02 h30 r90; Top Overlay "9" at 925.63,1563.67 h30 r90; Top Overlay "8" at 930.48,1252.89 h30 r90; Top Overlay "1" at 498.98,1250.02 h30 r90